# Altium PCB PCB.PcbDoc
Units mil, origin at the board's own origin, x right, y up, seen from the top; angles counter-clockwise.
Board outline 2358.93 x 1717.46 mil, 2 copper layers (Top Layer, Bottom Layer); 45 components, 34 nets, 180 pads, 77 vias.
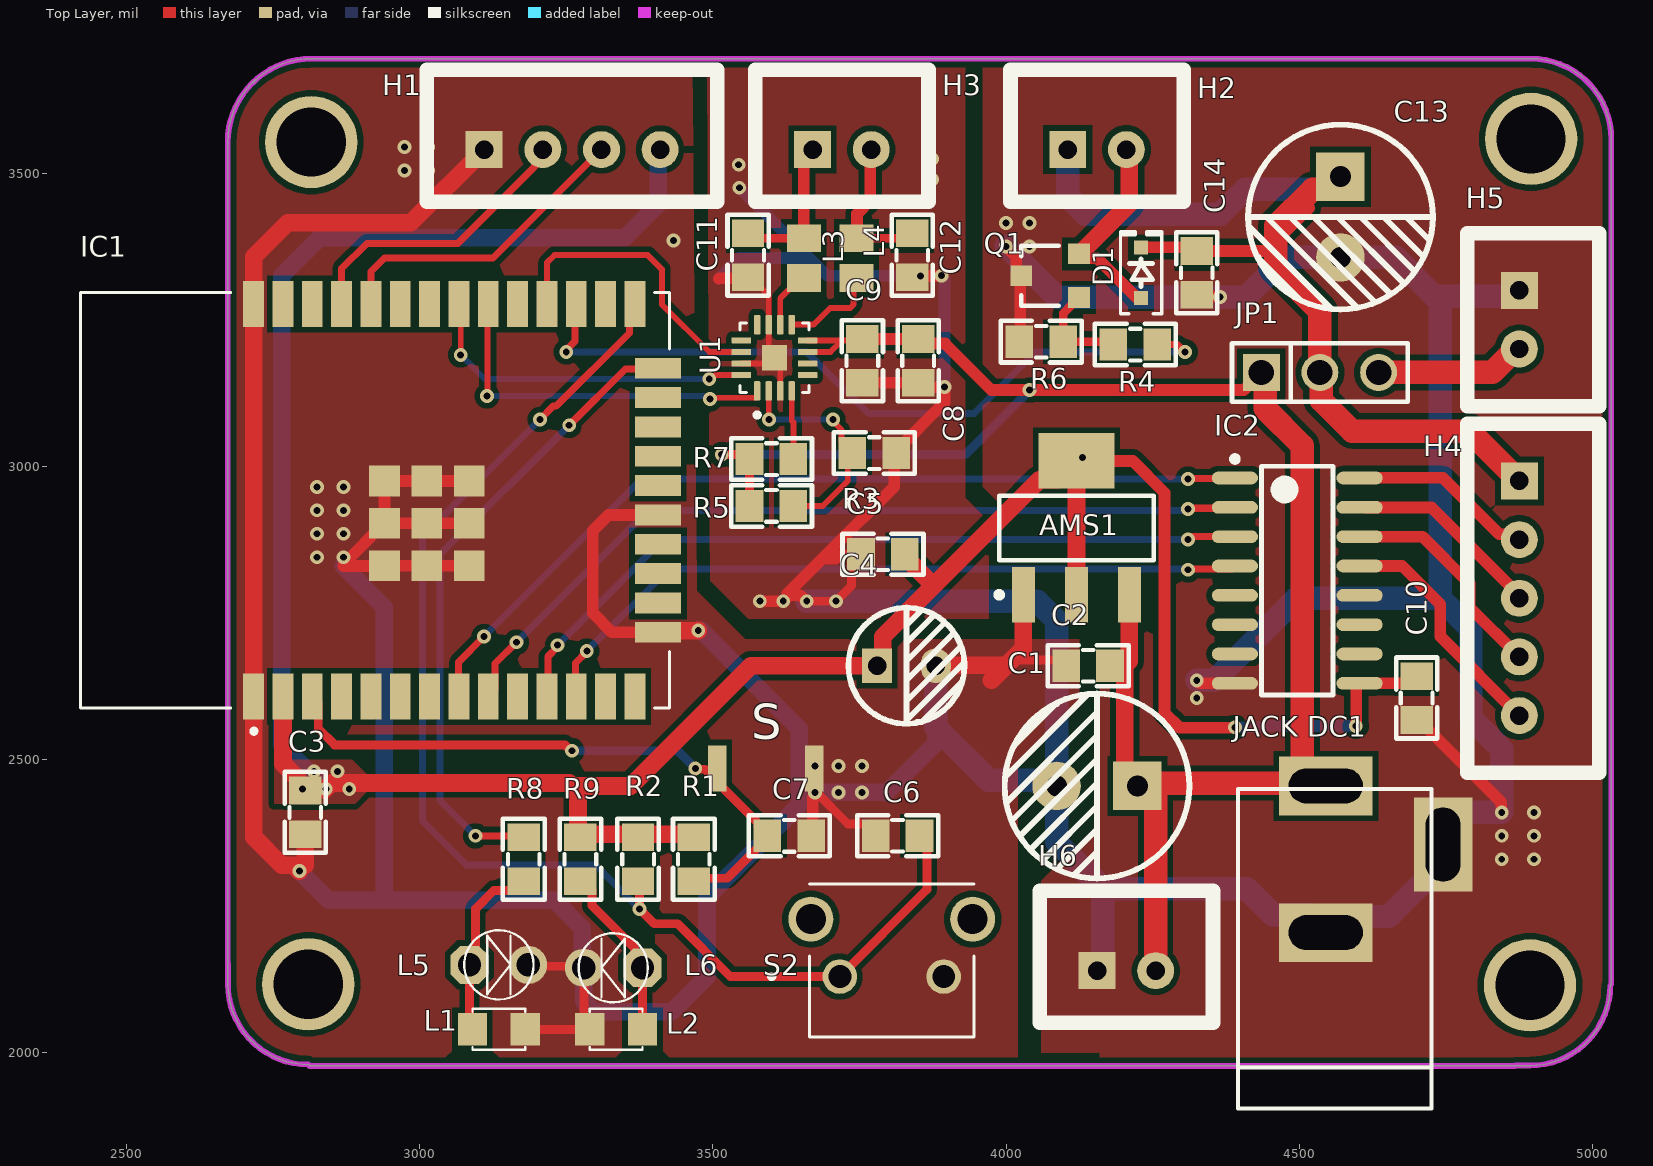
[diagram p0: Top Layer view]
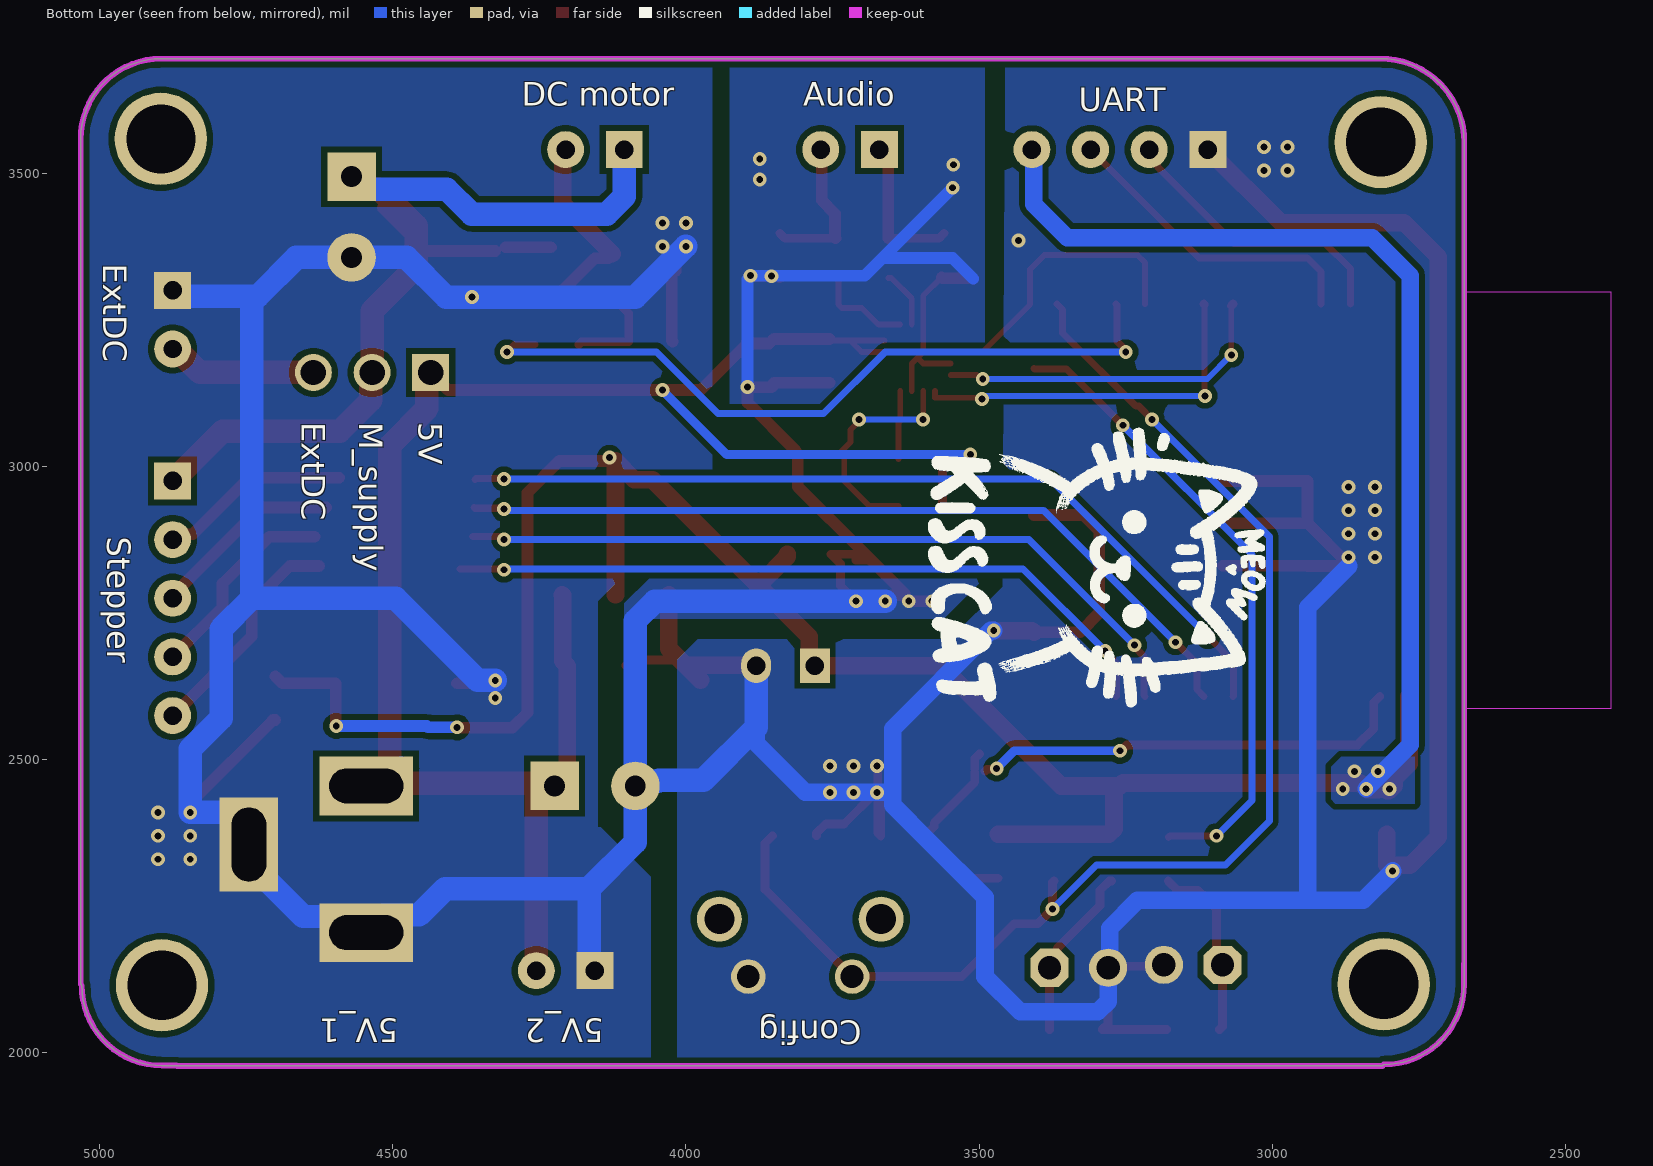
[diagram p1: Bottom Layer view, seen from below]
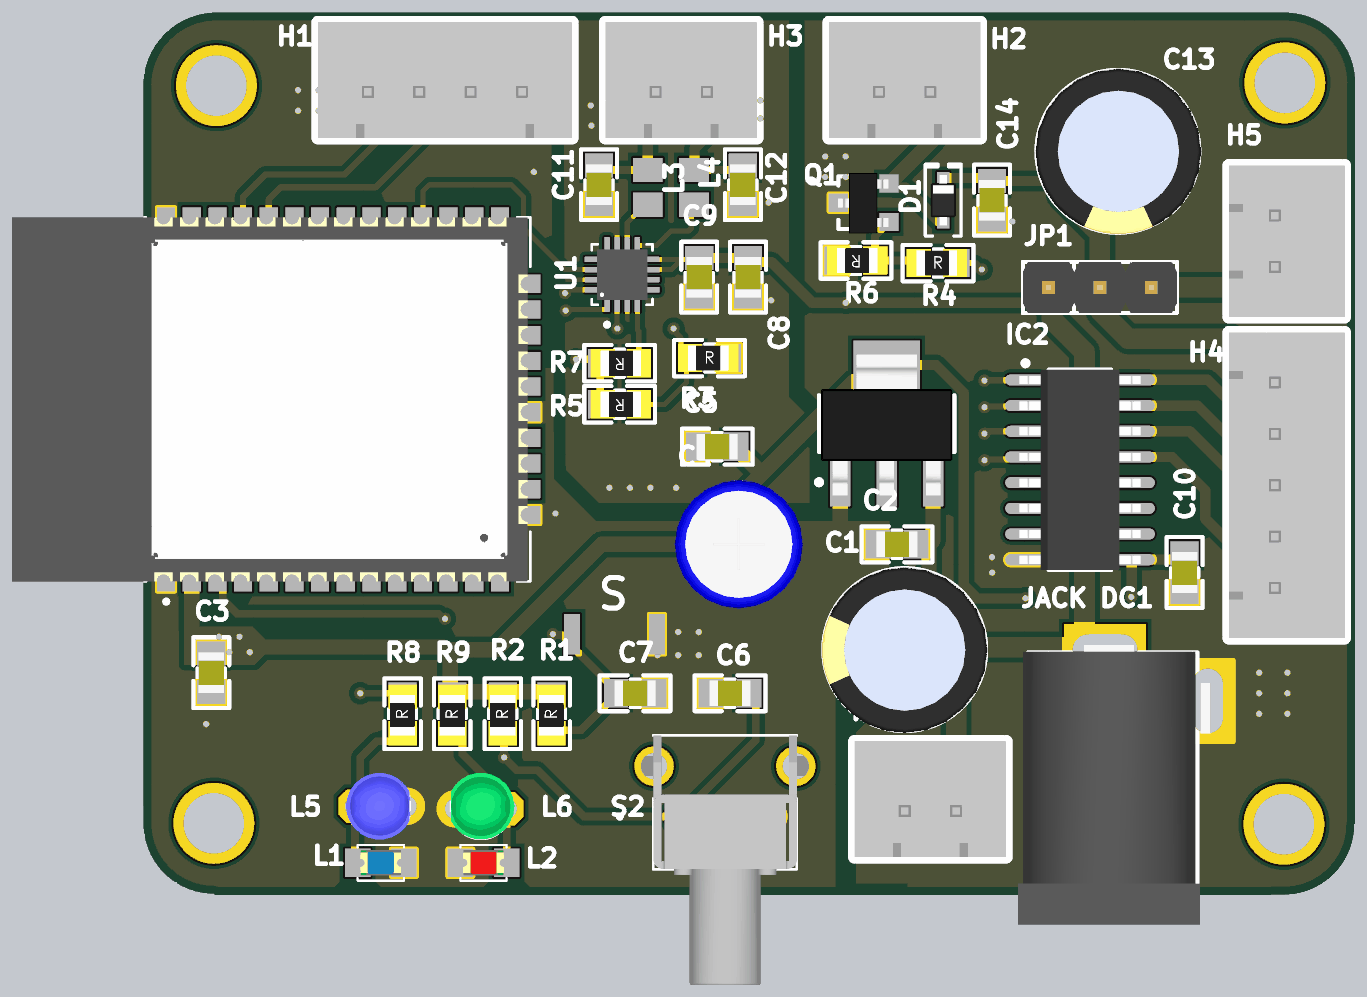
[diagram p2: 3D render of the assembled board from above, using the file's embedded part models]

## Layer stack, top to bottom
Top Solder: solder mask 0.4, Solder Resist, Dk 3.5
Top Layer: signal copper 1.4
Dielectric 1: dielectric 12.6, FR-4, Dk 4.8
Bottom Layer: signal copper 1.4
Bottom Solder: solder mask 0.4, Solder Resist, Dk 3.5

## Board outline
2673.2,2116.8 2673.2,2151.8 2672.87,2147.13 2672.87,3552.87 cw(c2815,3552.87) 2815,3695 4895,3695 cw(c4895,3558.2) 5031.8,3558.2 5031.8,2116.8 5030,2115 cw(c4893.2,2115) 4893.2,1978.2 4868.2,1978.2 4867.54,1977.54 2812.46,1977.54 2810,1980 cw(c2810,2116.8)

## Design rules (kind name [scope] priority, off if disabled: settings)
Clearance [All] p1: gap=10 ignorepadtopadclearanceinfootprint=FALSE except(5: SMDPad-SMDPad; 9: Arc-Arc Arc-Track Arc-SMDPad Track-Track Track-SMDPad)
PolygonConnect [All] p1: connectstyle=Direct reliefconductorwidth=10 reliefentries=4 polygonreliefangle="90 Angle" airgapwidth=10
RoutingVias [All] p1: holewidth=11.81 width=23.62 viastyle="Through Hole" minholewidth=11.81 minwidth=19.68 maxholewidth=15.75 maxwidth=23.62
SolderMaskExpansion [All] p1: expansion=4 istentingtop=FALSE
Width [All] p1: maxlimit=40 minlimit=10 preferedwidth=15
30 further rules are at their usual default settings.

## Components (designator, comment, footprint, x,y, rotation, side; value= is the part's Value field where it differs from the comment)
AMS1 "" SOT223 4120,2895 r0 top value="AMS1117-3.3V SOT223"
C1 "470uF" "tu hoa 8mm" 4155,2455 r180 top
C2 "104" "tu 0805" 4140,2660 r180 top
C3 "104" "tu 0805" 2805,2410 r270 top
C4 "220uF" "tu hoa 5mm" 3830,2660 r0 top
C5 "104" "tu 0805" 3790,2850 r180 top
C6 "106" "tu 0805" 3630,2370 r0 top
C7 "106" "tu 0805" 3815,2370 r180 top
C8 "106" "tu 0805" 3850,3180 r270 top
C9 "104" "tu 0805" 3755,3180 r270 top
C10 "104" "tu 0805" 4700,2605 r270 top
C11 "221" "tu 0805" 3560,3360 r270 top
C12 "221" "tu 0805" 3840,3360 r270 top
C13 "470uF" "tu hoa 8mm" 4570,3425 r270 top
C14 "104" "tu 0805" 4325,3330 r270 top
D1 "1N4148" "DIODE SOD323F" 4230,3330 r90 top
H1 "UART" XH2.54M-4 3110,3540 r0 top
H2 "Audio" XH2.54M-2 4105,3540 r0 top
H3 "Audio" XH2.54M-2 3670,3540 r0 top
H4 "Stepper" XH2.54M-5 4875,2975 r270 top
H5 "Ext-MS" XH2.54M-2 4875,3300 r270 top
H6 "Ext-MS" XH2.54M-2 4155,2140 r0 top
IC1 "ESP32 WROOM 32" ESP32-WROOM-32D 2924.06,2942.13 r90 top
IC2 "ULN2003" "SOP 16" 4496.3,2805 r0 top
"JACK DC1" "JACK DC 5.5" "JACK DC 5.5" 4645,2330 r90 top value="Jac DC"
JP1 "MSS" "JP 1x3 DT" 4435,3160 r0 top
L1 "Config" LED-0805-Blue 3090,2040 r0 top
L2 "Power" LED-0805-Red 3380,2040 r180 top
L3 "Ferrit" INDC2012X105N 3655,3355 r90 top
L4 "Ferrit" INDC2012X105N 3745,3355 r90 top
L5 "LED 3mm" LED-3MM-BLUE 3140,2150 r0 top
L6 "LED 3mm" LED-3MM-GREEN 3380,2145 r180 top
Q1 "AO3400" SOT23 4075,3325 r90 top
R1 "10k" "tro smd 0805" 3465,2330 r90 top
R2 "10k" "tro smd 0805" 3370,2330 r90 top
R3 "100k" "tro smd 0805" 3775,3025 r0 top
R4 "10k" "tro smd 0805" 4220,3210 r0 top
R5 "100k" "tro smd 0805" 3600,2930 r180 top
R6 "10k" "tro smd 0805" 4060,3210 r180 top
R7 "100k" "tro smd 0805" 3600,3010 r180 top
R8 "1k" "tro smd 0805" 3175,2330 r90 top
R9 "1k" "tro smd 0805" 3271.67,2330 r90 top
S "SKRKAEE010" SKRK 3590,2485 r0 top
S2 "1-1825027-2" SW_1-1825027-2 3805,2130 r0 top
U1 "MAX98357AETE" QFN50P300X300X80-17N 3605,3185 r90 top

## Footprints (in the part's own frame and the unit in brackets; to place one, negate y for a bottom-side part, rotate by r counter-clockwise, add the part's x,y. Pads: shape width x height; smd on the part's side, far side on the other; paste and mask are expansions set on the pad)
"DIODE SOD323F" [mm] "SOD323F"
  rect 0.6x0.6 smd: 1(-1.1,0) 2(1.1,0)
  silkscreen extent -1.78,-0.89 1.78,0.89, body extent -1.25,-0.62 1.25,0.63, height 0.8
ESP32-WROOM-32D [mm]
  rect 2x0.9 smd: 1(-8.5,5.26) 2(-8.5,3.99) 3(-8.5,2.72) 4(-8.5,1.45) 5(-8.5,0.18) 6(-8.5,-1.09) 7(-8.5,-2.36) 8(-8.5,-3.63) 9(-8.5,-4.9) 10(-8.5,-6.17) 11(-8.5,-7.44) 12(-8.5,-8.71) 13(-8.5,-9.98) 14(-8.5,-11.25) 25(8.5,-11.25) 26(8.5,-9.98) 27(8.5,-8.71) 28(8.5,-7.44) 29(8.5,-6.17) 30(8.5,-4.9) 31(8.5,-3.63) 32(8.5,-2.36) 33(8.5,-1.09) 34(8.5,0.18) 35(8.5,1.45) 36(8.5,2.72) 37(8.5,3.99) 38(8.5,5.26)
  rect 0.9x2 smd: 15(-5.715,-12.25) 16(-4.445,-12.25) 17(-3.175,-12.25) 18(-1.905,-12.25) 19(-0.635,-12.25) 20(0.635,-12.25) 21(1.905,-12.25) 22(3.175,-12.25) 23(4.445,-12.25) 24(5.715,-12.25)
  rect 1.33x1.33 smd: 39(-2.835,-2.24) 39(-2.835,-0.405) 39(-2.835,-4.075) 39(-1,-0.405) 39(-1,-4.075) 39(-1,-2.24) 39(0.835,-0.405) 39(0.835,-4.075) 39(0.835,-2.24)
  Keep-Out Layer region: 9,6.45 -9,6.45 -9,12.75 9,12.75
  Keep-Out Layer region: 9,6.45 -9,6.45 -9,12.75 9,12.75
  silkscreen extent -10.1,-12.75 9,12.75, body extent -9,-12.62 9,12.88, height 3.2
INDC2012X105N [mm]
  rect 1.2x1.47 smd: 1(-0.86,0) 2(0.86,0)
"JACK DC 5.5" [mil] "Jac DC input"
  rect 100x160 hole 59.06 slot 125.98 at 90 deg: 1(125,100) 2(-125,100)
  rect 160x100 hole 59.06 slot 125.98 at 0 deg: 3(25,-100)
  silkscreen extent -425,-80 120,250, body extent -410,-105 134,269, height 434
"JP 1x3 DT" [mm]
  rect 1.6x1.6 hole 1.1: 1(0,0)
  round 1.6 hole 1.1: 2(2.54,0) 3(5.08,0)
  silkscreen extent -1.27,-1.27 6.35,1.27, body extent -1.27,-1.27 6.35,1.27, height 8.54
LED-3MM-BLUE [mil]
  oct 65x65 hole 40: 1(-55,0)
  round 65 hole 40: 2(45,0)
  silkscreen extent -64,-59 54,59, body extent -72,-65 54,65, height 184
LED-3MM-GREEN [mil]
  oct 65x65 hole 40: 1(0,0)
  round 65 hole 40: 2(100,0)
  silkscreen extent -9,-59 109,59, body extent -15,-70 112,60, height 182
LED-0805-Blue [mil]
  rect 50x55 smd: 1(0,0) 2(90,0)
  silkscreen extent 0,-35 90,35, body extent 5,-25 85,25, height 43
LED-0805-Red [mil]
  rect 50x55 smd: 1(0,0) 2(90,0)
  silkscreen extent 0,-35 90,35, body extent 5,-25 85,25, height 43
QFN50P300X300X80-17N [mm]
  rrect25% 0.84x0.27 smd: 1(-1.435,0.75) 2(-1.435,0.25) 3(-1.435,-0.25) 4(-1.435,-0.75) 9(1.435,-0.75) 10(1.435,-0.25) 11(1.435,0.25) 12(1.435,0.75)
  rrect25% 0.27x0.84 smd: 5(-0.75,-1.435) 6(-0.25,-1.435) 7(0.25,-1.435) 8(0.75,-1.435) 13(0.75,1.435) 14(0.25,1.435) 15(-0.25,1.435) 16(-0.75,1.435)
  rect 1.1x1.1 smd paste-0.2: 17(0,0)
  silkscreen extent -2.57,-1.5 1.5,1.5, body extent -1.25,-1.25 1.25,1.25, height 0.55
SKRK [mm]
  rect 0.8x2 smd: 1(-2.1,0) 2(2.1,0)
  body extent -2.4,-1.45 2.4,1.45, height 2
"SOP 16" [mm] "SOIC, 16-Leads, Body 9.90x3.91mm, Pitch 1.27mm, IPC Medium Density"
  oval 2x0.55 smd: 1(-2.7,4.445) 2(-2.7,3.175) 3(-2.7,1.905) 4(-2.7,0.635) 5(-2.7,-0.635) 6(-2.7,-1.905) 7(-2.7,-3.175) 8(-2.7,-4.445) 9(2.7,-4.445) 10(2.7,-3.175) 11(2.7,-1.905) 12(2.7,-0.635) 13(2.7,0.635) 14(2.7,1.905) 15(2.7,3.175) 16(2.7,4.445)
  silkscreen extent -2.82,-4.95 1.55,5.39, body extent -3,-4.95 3,4.95, height 1.4
SOT23 [mm] "SOT23"
  rect 0.9x0.95 smd: 1(-0.95,-1.25) 2(0,1.25)
  rect 0.9x0.95 smd mask+0: 3(0.95,-1.25)
  silkscreen extent -1.3,-0.38 1.3,1.25, body extent -1.52,-1.23 1.48,1.27, height 1.06
SOT223 [mm]
  rect 1x2.4 smd: 1(-2.3,-2.9) 2(0,-2.9) 3(2.3,-2.9)
  rect 3.3x2.4 smd: 4(0,2.9)
  silkscreen extent -3.47,-3.02 3.35,1.4, body extent -3.25,-3.56 3.25,3.4, height 1.68
SW_1-1825027-2 [mm]
  round 1.498 hole 0.99: 1(-2.25,0) 2(2.25,0)
  round 1.95 hole 1.3: S1(-3.505,2.49) S2(3.505,2.49)
  silkscreen extent -5.3,-2.61 3.55,4.01, body extent -4.19,-8.34 4.22,4.02, height 8.08
"tro smd 0805" [mm]
  rect 1.2x1.4 smd: 1(-0.946,-0.061) 2(0.954,-0.061)
  silkscreen extent -1.75,-0.97 1.75,0.84, body extent -1.56,-0.76 1.44,0.64, height 0.53
"tu 0805" [mm] "Compoment SMD 80x50mil"
  rect 1.2x1.4 smd: 1(-0.946,-0.003) 2(0.954,-0.003)
  silkscreen extent -1.75,-0.89 1.75,0.89, body extent -1.01,-0.64 1.01,0.63, height 0.61
"tu hoa 5mm" [mm]
  rect 1.3x1.5 hole 0.8: 1(-1.27,0)
  oval 1.3x1.5 hole 0.8: 2(1.27,0)
  silkscreen extent -2.51,-2.51 2.51,2.51, body extent -3.12,-3.18 3.23,3.18, height 11.53
"tu hoa 8mm" [mm]
  rect 2.1x2.1 hole 0.9: 1(-1.75,0)
  round 2.1 hole 0.9: 2(1.75,0)
  silkscreen extent -4,-4 4,4, body extent -4.1,-4.07 4.1,4.13, height 14.4
XH2.54M-2 [mm]
  rect 1.6x1.6 hole 0.8: 1(0,0)
  round 1.6 hole 0.8: 2(2.54,0)
  silkscreen extent -2.48,-2.26 5.02,3.46, body extent -2.48,-2.26 5.02,3.48, height 6.91
XH2.54M-4 [mm]
  rect 1.6x1.6 hole 0.8: 1(0,0)
  round 1.6 hole 0.8: 2(2.54,0) 3(5.08,0) 4(7.62,0)
  silkscreen extent -2.48,-2.26 10.1,3.46, body extent -2.48,-2.26 10.1,3.48, height 6.91
XH2.54M-5 [mm]
  rect 1.6x1.6 hole 0.8: 1(0,0)
  round 1.6 hole 0.8: 2(2.54,0) 3(5.08,0) 4(7.62,0) 5(10.16,0)
  silkscreen extent -2.48,-2.26 12.64,3.46, body extent -2.48,-2.26 12.64,3.48, height 6.91

## Part data
AMS1: library part "AMS1117 SMD", "Dán", Chung_Loai=Dán, Don_Vi=Con, Ma_Hang=MH000596
C1 C13: library part "Tu Hoa 470uF 16V 8x11", "Cắm", Chung_Loai=Cắm, Don_Vi=Con, Ma_Hang=MH006550, So_Chan=2, Ten_Linh_Kien="Tụ Hóa 470uF 16V 8x11MM"
C2 C3 C5 C9 C10 C14: library part "Tu 0805 104 50V 10%", "Dán", Chung_Loai=Dán, Don_Vi=Con, Ma_Hang=MH004551, So_Chan=2, Ten_Linh_Kien="Tụ 0805 104-100nF 10% 50V"
C4: library part "Tu Hoa 220uF 10V 6x11", "Cắm", Chung_Loai=Cắm, Don_Vi=Con, Ma_Hang=MH004510, So_Chan=2, Ten_Linh_Kien="Tụ Hóa 220uF 10V 6x11MM"
C6 C7 C8: library part "Tu 0805 106 16V 10%", "Dán", Chung_Loai=Dán, Don_Vi=Con, Ma_Hang=MH004553, So_Chan=2, Ten_Linh_Kien="Tụ 0805 106-10uF 10% 16V"
C11 C12: library part "Tu 0805 224 50V 10%", "Dán", Chung_Loai=Dán, Don_Vi=Con, Ma_Hang=MH004559, So_Chan=2, Ten_Linh_Kien="Tụ 0805 224-0.22uF 10% 50V"
D1: "SMD"
H1: library part "Header 4P 2.54 Duc Thang", "Cắm", Chung_Loai=Cắm, Don_Vi=Con, Ma_Hang=MH001285, Ten_Linh_Kien="Header 4P XH2.54-4P Đực Thẳng"
H2 H3 H5 H6: library part "Header 2P 2.54 Duc Thang", "Cắm", Chung_Loai=Cắm, Don_Vi=Con, Ma_Hang=MH001283, Ten_Linh_Kien="Header 2P XH2.54-2P Đực Thẳng"
H4: library part "Header 5P 2.54 Duc Thang", "Cắm", Chung_Loai=Cắm, Don_Vi=Con, Ma_Hang=MH001298, Ten_Linh_Kien="Header 5P XH2.54-5P Đực Thẳng"
IC2: library part "ULN2003A SMD", "Dán", Chung_Loai=Dán, Don_Vi=Con, Ma_Hang=MH002408, Ten_Linh_Kien="ULN2003 SOP16"
JP1: library part "JP 1x3 2.54 Duc Thang", "Cắm", Chung_Loai=Cắm, Don_Vi=Con, Ma_Hang=MH000903, Ten_Linh_Kien="Jump Đơn Đực 2.54MM 1x40P Thẳng 11MM"
L1: library part "LED 0805 Xanh Duong", "Dán", Chung_Loai=Dán, Don_Vi=Con, Ma_Hang=MH002327, Ten_Linh_Kien="LED 0805 Màu Xanh Dương (Blue)"
L2: library part "LED 0805 Do", "Dán", Chung_Loai=Dán, Don_Vi=Con, Ma_Hang=MH000897, Ten_Linh_Kien="LED 0805 Màu Đỏ (Red)"
L3 L4: library part AIML-0805-1R0K-T, "IND 1uH 0.05A 400mâ„", Package="2012 Bourns", Availability="In Stock", Check_prices=https://www.snapeda.com/parts/AIML-0805-1R0K-T/Abracon+LLC/view-part/?ref=eda, MF=Abracon, MP=AIML-0805-1R0K-T, Price=None, Purchase-URL=https://pricing.snapeda.com/search/part/AIML-0805-1R0K-T/?ref=eda, SnapEDA_Link=https://www.snapeda.com/parts/AIML-0805-1R0K-T/Abracon+LLC/view-part/?ref=snap
L5: library part "LED 3mm Xanh Duong", "Cắm", Chung_Loai=Cắm, Don_Vi=Con, Ma_Hang=MH009003, Ten_Linh_Kien="LED 3MM Xanh Dương SS (1000c)"
L6: library part "LED 3mm Xanh La", "Cắm", Chung_Loai=Cắm, Don_Vi=Con, Ma_Hang=MH001054, Ten_Linh_Kien="Led 3MM Phủ Xanh (10c)"
Q1: library part Si2302DS, "N-Channel MOSFET", LatestRevisionDate=17-Jul-2002, LatestRevisionNote="Re-released for DXP Platform.", PackageDescription="TO, Flat Index; 3 In-Line, Axial Leads; Body Dia. 4.6mm; Lead Dia. 0.5 mm (max)", PackageReference=E3, PackageVersion=1995/1996, Published=8-Jun-2000, Publisher="Altium Limited"
R1 R2 R3 R4 R5 R6 R7 R8 R9: library part "Tro 0805 5% 10k", "Dán", Chung_Loai=Dán, Don_Vi=Con, Ma_Hang=MH005239, So_Chan=2, Ten_Linh_Kien="Trở 0805 5% 10k"
S: "Switch Tactile N.O. SPST Round Button Gull Wing 0.05A 12VDC 1.57N SMD T/R", Package=None, Availability=Unavailable, MF=ALPS, MP=SKRKAEE010, Price=None, SnapEDA_Link=https://www.snapeda.com/parts/SKRKAEE010/ALPS/view-part/380772/?ref=snap
S2: "Tactile Switch SPST-NO Side Actuated Through Hole, Right Angle", Package=None, Availability=Good, Check_prices=https://www.snapeda.com/parts/1-1825027-2/TE%20Connectivity%20ALCOSWITCH%20Switches/view-part/904477/?ref=eda, MF="TE Connectivity", MP=1-1825027-2, Price=None, Purchase-URL=https://pricing.snapeda.com/search/part/1-1825027-2/?ref=eda, SnapEDA_Link=https://www.snapeda.com/parts/1-1825027-2/TE%20Connectivity%20ALCOSWITCH%20Switches/view-part/904477/?ref=snap
U1: "Audio Amp Speaker 1-CH Mono 3.2W Class-D 16-Pin TQFN EP T/R", Package=None, Availability="In Stock", Check_prices=https://www.snapeda.com/parts/MAX98357AETE/Maxim+Integrated/view-part/?ref=eda, MF="Maxim Integrated", MP=MAX98357AETE, Price=None, Purchase-URL=https://pricing.snapeda.com/search/part/MAX98357AETE/?ref=eda, SnapEDA_Link=https://www.snapeda.com/parts/MAX98357AETE/Maxim+Integrated/view-part/?ref=snap

## Free pads (board coordinates)
  round 157.48 hole 118.11: ""(2810,2116.8) ""(2815,3552.87) ""(4893.2,2115) ""(4895,3558.2)

## Via types
v1: diameter 23.62, hole 11.81, Top Layer to Bottom Layer, tented both sides, 77 vias

## Nets (pads, with @x,y where several pads share a name; then routed paths per layer and width w, separated by ;. In a path a pad name is that pad's centre, name@x,y a point inside that pad or via, vN(x,y) a via of type N, cw(c..) or ccw(c..) an arc to the next point about the centre after c; other vN are vias at no path point)
1A: H4.2 IC2.16 | length 327.5
  Top Layer w20: IC2.16@4591.13,2980.32 4744.68,2980.32 4840.82,2884.18 4865.82,2884.18 H4.2
1B: H4.3 IC2.15 | length 329.1
  Top Layer w20: IC2.15@4612.95,2929.68 4725.37,2929.68 4875,2780.05 H4.3
2A: H4.4 IC2.14 | length 350.4
  Top Layer w20: IC2.14@4632.95,2880 4710,2880 4790,2800 4790,2760 H4.4
2B: H4.5 IC2.13 | length 387.5
  Top Layer w20: IC2.13@4625.35,2830 4675,2830 4740,2765 4740,2710 H4.5
3V3: AMS1.2 AMS1.4 C3.1 C4.1 C5.1 C10.1 H1.4 IC1.2 IC2.9 R1.2 R2.2 R9.2 | length 5068.1
  Top Layer w20: AMS1.4 4215.83,3009.17 4270,2955 4270,2580 4295.69,2554.31 4389.31,2554.31 v1(4390,2555) ; v1(4596.07,2557.22) 4596.76,2557.91 4596.76,2629.24 4597.53,2630 IC2.9 4602.91,2630.32 4687.95,2630.32 C10.1
  Top Layer w30: IC1.2 2766.97,2493.03 2792.31,2467.69 2792.31,2455.85 2800.93,2447.23 C3.1 ; C3.1@2819.15,2448.28 2838.28,2448.28 2850,2460 3255.08,2460 ; 3260,2455 3360,2455 3565,2660 C4.1 3789.38,2669.38 3789.38,2709.38 3870,2790 ; 3270,2451.35 3270,2381.64 3279.06,2372.57 R1.2@3467.39,2372.57 ; C5.1 3827.23,2846.2 3870,2803.43 3870,2790 ; AMS1.2 AMS1.4 4087.76,2976.93 4056.93,2976.93 3870,2790
  Bottom Layer w20: v1(4390,2555) 4439.59,2555 4441.81,2557.22 v1(4596.07,2557.22)
  Bottom Layer w30: v1(2840,2450) 2765,2525 2765,3325 2830,3390 3350,3390 3406.52,3446.52 3406.52,3536.52 H1.4
  other v1: 2800,2450 2880,2450 2820,2480 2860,2480 4130,3015
+5: "JACK DC1.1" AMS1.3 C1.1 C2.1 C8.1 C9.1 H6.2 JP1.1 R5.2 R7.2 U1.7 U1.8 | length 3378.1
  Top Layer w10: U1.7 3700.31,3194.84 3720,3214.53 ; U1.8 3720,3214.53 ; C9.1 3752.17,3214.53 3720,3214.53
  Top Layer w15: v1(3515,3020) 3554.82,3020 R7.2 R5.2
  Top Layer w20: C9.1 C8.1 3857.72,3209.38 3895.62,3209.38 3975,3130 v1(4040,3130) 4405,3130 4425,3150 JP1.1
  Top Layer w30: AMS1.3 4210,2780.28 4210,2667.91 4202.23,2660.13 4202.23,2476.67 C1.1
  Top Layer w40: H6.2 4255,2460 4510,2460 ; JP1.1@4425,3150 4439.93,3150 4441.42,3148.5 4441.42,3098.58 4505,3035 4505,2465 4510,2460 ; 4545,2455 4515,2455 4510,2460
  Bottom Layer w15: v1(3515,3020) 3930,3020 v1(4040,3130)
  Bottom Layer w20: JP1.1@4413.5,3138.5 JP1.1
  Bottom Layer w40: 4485,2485 4515,2455 4545,2455
BCLK: IC1.31 U1.16 | length 586
  Top Layer w10: v1(3070,3190) IC1.31@3070,3273.74 ; v1(3493.8,3149.04) 3497.49,3149.04 3503.93,3155.47 3548.19,3155.47 U1.16@3548.31,3155.35
  Top Layer w15: IC1.31 IC1.31@3070,3273.74
  Bottom Layer w10: v1(3070,3190) 3110.96,3149.04 v1(3493.8,3149.04)
Boot: C7.1 IC1.25 R2.1 S2.1 | length 2211.6
  Top Layer w12: v1(3205,3080) 3227.82,3102.82 3232.82,3102.82 3357.6,3227.6 3357.6,3267.4 IC1.25
  Top Layer w15: R2.1 3375,2290.17 v1(3375,2245) 3400,2220 3440,2220 3530,2130 S2.1 3865,2278.58 3865,2357.36 C7.1
  Bottom Layer w12: v1(3205,3080) 3005,2880 3005,2395 3080,2320 3300,2320 v1(3375,2245)
DAC: IC1.10
DIN: IC1.30 U1.1 | length 632.3
  Top Layer w10: v1@3115.98,3120.98 IC1.30@3115.98,3275.79 ; v1(3495,3115) 3496.97,3116.97 3575.16,3116.97 3575.47,3117.28 U1.1
  Top Layer w15: v1(3115,3120) v1@3115.98,3120.98 ; IC1.30@3115.98,3275.79 IC1.30
  Bottom Layer w10: v1(3115,3120) 3490,3120 v1(3495,3115)
Ext-M: H5.2 JP1.3 | length 256.6
  Top Layer w40: JP1.3 4828.78,3160 4868.78,3200 H5.2
GND: "JACK DC1.2" "JACK DC1.3" AMS1.1 C1.2 C2.2 C3.2 C4.2 C5.2 C6.2 C7.2 C8.2 C9.2 C10.2 C11.2 C12.2 C13.2 C14.2 H1.1 H5.1 H6.1 IC1.1 IC1.15 IC1.19 IC1.38 IC1.39 IC2.8 L1.2 L2.2 L5.2 L6.2 Q1.2 R3.2 R6.2 S2.2 S.2 U1.3 U1.11 U1.15 U1.17 | length 13556.9
  Top Layer w10: U1.15 3595.16,3175.16 U1.17 ; C11.2@3563.8,3322.43 3595.16,3291.07 U1.11 3595.16,3194.84 U1.17 ; U1.3 3614.84,3175.16 U1.17
  Top Layer w15: L1.2 L2.2 3280,2050 L6.2 3277.5,2147.5 3187.5,2147.5 L5.2 ; v1(3660,2770) v1(3710,2770) 3736.3,2796.3 3736.3,2834.01 C5.2 3700.13,2850.13 ; S.2 v1@3672.68,2440.52 ; 3684.1,2840.13 3710.13,2840.13 ; C7.2 3777.43,2374.07 3761.3,2390.19 3730.25,2390.19 3676.3,2444.14 v1(3673.96,2444.14) 3673.96,2441.81 v1@3672.68,2440.52 ; 4010,2670 4092.56,2670 C2.2 ; v1@3672.68,2440.52 3672.68,2374.97 C6.2 3667.57,2435.42 v1@3672.68,2440.52
  Top Layer w20: IC1.39@3084.49,2830.51 3012.24,2830.51 2940,2830.51 2939.49,2830 2870,2830 2870.69,2830.69 2870.69,2833.45 IC1.39@2940,2902.76 ; IC1.39@3084.49,2902.76 3012.24,2902.76 IC1.39@2940,2902.76 ; IC1.39@3084.49,2975 3012.24,2975 2940,2975 IC1.39@2940,2902.76 ; IC1.15 3327.87,2717.13 3295,2750 3295,2890 3322.13,2917.13 IC1.19 ; 3510,3320 3510.69,3320.69 3562.07,3320.69 C11.2@3563.8,3322.43 ; v1(3580,2770) v1(3620,2770) 3630,2780 3649.02,2780 3659.02,2770 v1(3660,2770) ; 3626.98,2783.02 3684.1,2840.13 3697.12,2853.15 3809.01,2965.05 3809.01,3019.04 R3.2 3812.57,3026.54 3894.93,3108.89 3894.93,3134.93 v1(3895,3135) 3853.35,3135 C8.2@3845.93,3142.43 ; C9.2 C8.2@3845.93,3142.43 ; C12.2 3841.75,3324.31 3889.31,3324.31 v1(3890,3325) ; C8.2 C8.2@3845.93,3142.43 ; v1(4000,3375) 4000,3374.02 4017.09,3356.93 Q1.2@4017.09,3332.72 ; R6.2 4024.11,3214.07 4024.11,3323.32 Q1.2 ; C14.2 4328.19,3289.1 4364.15,3289.1 v1(4364.84,3288.4) ; v1(4325,2635) 4325.98,2635 4330.66,2630.32 4389.68,2630.32 IC2.8 ; C10.2 4703.8,2567.43 4844.31,2426.92 4844.31,2410.69 v1(4845,2410)
  Top Layer w30: v1(2795,2310) 2785.13,2319.87 2765.13,2319.87 2716.97,2368.03 IC1.1 IC1.38 2716.97,3356.97 2775,3415 2985,3415 H1.1 ; 2804.87,2319.87 C3.2 ; IC1.15 3409.06,2719.84 3474.84,2719.84 v1(3475,2720) ; C4.2 3880.55,2660.55 4000.55,2660.55 ; 3975,2635 4000.55,2660.55 ; AMS1.1 4029.45,2689.45 4010,2670 4000.55,2660.55
  Top Layer w40: H6.1@4145,2130 H6.1
  Bottom Layer w20: L6.2@3277.5,2147.5 L6.2 ; 3510,3320 3545,3355 3665,3355 ; v1(3545,3475) 3665,3355 ; v1(3895,3135) 3895,3319.02 3890,3324.02 v1(3890,3325) 3695,3325 3665,3355 ; 4705,2395 4745,2355
  Bottom Layer w30: v1(2795,2310) 2845,2260 2940,2260 ; 2870,2830 2940,2760 2940,2260 ; L6.2@3277.5,2147.5 3277.5,2212.5 3230,2260 2940,2260 ; L6.2 3280,2087.57 3297.57,2070 3430,2070 3490,2130 3490,2265 3585.98,2360.98 3647.5,2422.5 3647.5,2444.73 ; v1(3475,2720) 3480,2720 3647.5,2552.5 3647.5,2444.73 ; 3880,2555 3880,2527.5 3796.64,2444.14 v1(3753.96,2444.14) v1(3713.96,2444.14) v1(3673.96,2444.14) 3648.09,2444.14 3647.5,2444.73 ; H6.1@4145,2130 H6.1
  Bottom Layer w40: v1(3660,2770) v1(3710,2770) 4052.67,2770 4086.1,2736.57 C1.2@4086.1,2465 ; C4.2 3880,2555 3970,2465 4045.93,2465 4047.76,2463.17 4077.94,2463.17 C1.2 4086.1,2358.9 4165,2280 ; v1(4000,3375) 4086.6,3288.4 v1(4364.84,3288.4) 4408.4,3288.4 4476.1,3356.1 C13.2 4663.9,3356.1 4730,3290 4740,3290 ; H6.1 4165,2150 4165,2280 ; v1(4325,2635) 4355,2635 4495,2775 4740,2775 ; H5.1 4865,3290 4740,3290 ; 4165,2280 4410,2280 4455,2235 4515,2235 4545,2205 4572.43,2232.43 4652.43,2232.43 4715,2295 4745,2325 4745,2355 4745,2380 4775,2410 v1(4845,2410) 4845,2518.03 4792.5,2570.53 4792.5,2722.5 4740,2775 ; 4740,2775 4740,3290
  other v1: 4845,2330 4900,2330 4845,2370 4900,2370 4900,2410 3673.96,2489.14 3713.96,2489.14 3753.96,2489.14 4325,2605 2825,2845 2870,2845 2825,2885 2870,2885 2825,2925 2870,2925 2825,2965 2870,2965 3853.96,3324.14 4040,3375 3432.94,3384.97 4000,3415 4040,3415 3873.96,3489.14 2973.96,3504.14 3013.96,3504.14 3543.96,3514.14 3873.96,3524.14 2973.96,3544.14 3013.96,3544.14
IN1: IC1.8 IC2.1 | length 1483.4
  Top Layer w12: IC1.8 3065.98,2608.46 3065.98,2665.98 v1(3110,2710) ; v1(4310.28,2978.61) 4310.97,2979.31 4357.7,2979.31 IC2.1@4359.78,2977.22
  Bottom Layer w12: v1(3110,2710) 3378.61,2978.61 v1(4310.28,2978.61)
IN2: IC1.9 IC2.2 | length 1403.8
  Top Layer w12: IC1.9 3128.69,2619.2 3128.69,2663.69 v1(3165,2700) ; v1(4310.28,2926.94) 4311.81,2928.47 4359.63,2928.47 IC2.2@4361.16,2930
  Bottom Layer w12: v1(3165,2700) 3390,2925 4308.34,2925 v1(4310.28,2926.94)
IN3: IC1.11 IC2.3 | length 1298.3
  Top Layer w12: IC1.11 3218.48,2609 3218.48,2675.34 3235,2691.86 v1(3235,2695) ; v1@4310,2880 IC2.3@4363.38,2880
  Bottom Layer w12: v1(3235,2695) 3415.28,2875.28 v1(4310.28,2875.28)
IN4: IC1.12 IC2.4 | length 1245.2
  Top Layer w12: IC1.12 3265.98,2608.46 3265.98,2664.85 3285,2683.87 v1(3285,2685) ; v1(4310.28,2823.61) 4311.67,2825 IC2.4@4385.3,2825
  Bottom Layer w12: v1(3285,2685) 3425,2825 4308.89,2825 v1(4310.28,2823.61)
LED: IC1.24 R8.2 | length 1090.9
  Top Layer w12: v1(3095,2370) 3174.97,2370 R8.2 ; v1(3255,3070) 3351,3166 3405.21,3166 IC1.24
  Bottom Layer w12: v1(3095,2370) 3035,2430 3035,2850 v1(3255,3070)
LRCLK: IC1.28 U1.14 | length 510.7
  Top Layer w10: IC1.28 3216.97,3346.97 3230,3360 3389,3360 3413,3336 3413,3276 3494.16,3194.84 U1.14
M+: C13.1 C14.1 D1.2 H2.1 H4.1 JP1.2 | length 1738.1
  Top Layer w20: D1.2 C14.1@4307.31,3373.31 ; C14.1 4443.33,3367.23 ; 4473.05,3396.95 4516.38,3440.27
  Top Layer w30: H2.1 H2.1@4121.5,3523.5
  Top Layer w40: JP1.2@4535,3155 4535,3265 4460,3340 4460,3410 4522.56,3472.56 4548.66,3472.56 C13.1 ; JP1.2 4537.2,3157.8 4537.2,3112.8 4590,3060 4790,3060 H4.1
  Bottom Layer w40: H2.1 4105,3460 4135,3430 4365,3430 4407.56,3472.56 4548.66,3472.56 C13.1
M-: D1.1 H2.2 Q1.3 | length 352.9
  Top Layer w20: Q1.3@4125.2,3362.4 Q1.3 4131.93,3354.68 4155.32,3354.68 4221.5,3288.5 4228.19,3288.5 D1.1 ; H2.2 H2.2@4210,3535
  Top Layer w30: Q1.3@4125.2,3362.4 4210,3447.2 H2.2@4210,3535
NC: IC1.32
NetC11_1: C11.1 H3.1 L3.2 | length 256
  Top Layer w15: C11.1 3568.24,3388.86 L3.2
  Top Layer w20: L3.2 3655,3525 H3.1
NetC12_1: C12.1 H3.2 L4.2 | length 259.8
  Top Layer w15: L4.2 3831.5,3388.86 C12.1
  Top Layer w20: L4.2 3745.76,3389.62 3745.76,3430.76 3768.5,3453.5 3768.5,3538.5 H3.2
NetL1_1: L1.1 L5.1 R8.1 | length 313.4
  Top Layer w15: L1.1 3085,2045 L5.1 3095,2160 3095,2245 3126.65,2276.65 3161.27,2276.65 R8.1
NetL2_1: L2.1 L6.1 R9.1 | length 299
  Top Layer w15: R9.1 3278,2292.77 3294.12,2276.65 3294.12,2250.88 3366.86,2178.14 3366.86,2158.14 L6.1 L2.1
NetQ1_1: Q1.1 R4.1 R6.1 | length 174.5
  Top Layer w15: Q1.1 4123.23,3287.6 4113.01,3277.38 4113.01,3276.4 4097.23,3260.61 R6.1 4177.98,3212.39 R4.1
NetR3_1: R3.1 R5.1 U1.2 | length 390.2
  Top Layer w10: U1.2 3595.16,3080.58 v1(3595.64,3080.1) ; R5.1 3687.39,2932.39 3730,2975 3730,3014.83 R3.1 3719.15,3041.23 3719.15,3062.16 3705,3076.31 v1(3705,3080)
  Bottom Layer w10: v1(3595.64,3080.1) 3595.74,3080 v1(3705,3080)
NetR7_1: R7.1 U1.4 | length 117.2
  Top Layer w10: U1.4 3634.53,3077.47 3637.23,3074.77 R7.1
OUTN: L3.1 U1.10 | length 99.4
  Top Layer w10: U1.10 3614.84,3286.3 3649.69,3321.14 L3.1
OUTP: L4.1 U1.9 | length 167.1
  Top Layer w10: U1.9 3671.5,3241.5 3700,3270 3734.14,3270 3740,3275.86 3740,3316.14 L4.1
PWM: IC1.27 R4.2 | length 1283.4
  Top Layer w12: v1(3250,3195) 3250,3198.14 3265,3213.14 3265,3274.8 IC1.27 ; R4.2 4292.39,3207.61 v1(4305,3195)
  Bottom Layer w12: v1(3250,3195) 3660,3195 3765,3090 3945,3090 4050,3195 v1(4305,3195)
RST: C6.1 IC1.3 R1.1 S.1 | length 1081.6
  Top Layer w15: IC1.3 2827.19,2597.26 2827.19,2552.81 2855,2525 3247.67,2525 3257.67,2515 v1(3260,2515) ; R1.1@3467.39,2297.77 3524.61,2297.77 3592.77,2365.93 C6.1 3576.65,2385.99 3576.65,2392.05 3507.32,2461.38 S.1@3507.32,2478.25 ; v1(3470,2485) 3471.65,2483.35 3486.65,2483.35 3490,2480 ; S.1@3499.07,2510 3507.32,2501.75 S.1
  Bottom Layer w15: v1(3260,2515) 3440,2515 v1(3470,2485)
RX: H1.3 IC1.34 | length 534.4
  Top Layer w12: IC1.34 2916.97,3331.97 2940,3355 3125,3355 H1.3
TX: H1.2 IC1.35 | length 496.1
  Top Layer w12: IC1.35 2866.97,3336.97 2910,3380 3065,3380 3194.62,3509.62 3194.62,3510.28 3210,3525.66 H1.2
pads on no net: IC1.4 IC1.5 IC1.6 IC1.7 IC1.13 IC1.14 IC1.16 IC1.17 IC1.18 IC1.20 IC1.21 IC1.22 IC1.23 IC1.26 IC1.29 IC1.33 IC1.36 IC1.37 IC2.5 IC2.6 IC2.7 IC2.10 IC2.11 IC2.12 S2.S1 S2.S2 U1.5 U1.6 U1.12 U1.13

## Polygon pours and split planes (outlines as drawn)
3V3 on Top Layer "Top Layer-3V3" (solid, remove dead copper, pour order 0): 2890,2425 2910,2445 2910,2475 2885,2500 2760,2500 2752,2508 2752,2425
GND on Top Layer "GND_L01_P005" (solid, remove dead copper, pour order 5): 5035,3695 3960,3695 3960,2965 4160,2765 4160,1970 5045,1970 5050,1975
GND on Top Layer "GND_L01_P006" (solid, remove dead copper, pour order 6): 3465,3689.97 3472.5,2787.5 3555,2705 4020,2705 4020,1980 2680,1980 2680,3695
GND on Top Layer "GND_L01_P007" (solid, pour order 7): 3495.15,2804.85 3560,2740 3970,2740 3970,2906.39 3930,2946.39 3930,3690 3495,3690 3490,3695
GND on Top Layer "GND_L01_P008" (solid, remove dead copper, pour order 8): 4159.8,2392.8 4060,2293 4060,2000 4170,2000
GND on Top Layer "GND_L01_P009" (solid, pour order 9): 4020,2705 4125,2705 4125,2600 4020,2495 4015,2495
GND on Bottom Layer "GND_L02_P004" (solid, remove dead copper, pour order 4): 3490,2810 3560,2740 4105,2740 4105,2766.39 3925,2946.39 3925,3690 3490,3690
GND on Bottom Layer "GND_L02_P003" (solid, remove dead copper, pour order 3): 3455,3690 3460,2795 3550,2705 3980,2705 4015,2670 4015,1980 2675,1980 2675,3695
GND on Bottom Layer "GND_L02_P010" (solid, pour order 10): 4165,2385 4145,2385 4060,2300 4060,1970 4165,1970
GND on Bottom Layer "GND_L02_P002" (solid, remove dead copper, pour order 2): 5030,3695 3955,3695 3955,2965 4150,2770 4150,1970 5040,1970 5045,1975
3V3 on Bottom Layer "Bottom Layer-3V3" (solid, remove dead copper, pour order 1): 2892.5,2425 2900,2432.5 2900,2487.5 2882.5,2505 2757.5,2505 2757.5,2425

## Keep-outs
Keep-Out Layer:
  lines w10: 2672.87,2147.13 2672.87,3552.87 cw(c2815,3552.87) 2815,3695 4875,3695 4895,3695 cw(c4895,3558.2) 5031.8,3558.2 5031.8,2141.8 5031.8,2116.8 ; 2673.2,2151.8 2673.2,2116.8 ccw(c2810,2116.8) 2810,1980 ; 2812.46,1977.54 2832.46,1977.54 4867.54,1977.54 ; 4868.2,1978.2 4893.2,1978.2 ccw(c4893.2,2115) 5030,2115

## Silkscreen, mask and mechanical layers (free items; w line width, h text height)
Bottom Overlay:
  drawing of 46 lines, arcs and shapes, not listed
  text "Audio" at 3800,3615 h40
  text "DC motor" at 4280,3615 h40
  text "UART" at 3330,3605 h40
  text "ExtDC" at 4993.34,3345 h40 r90
  text "5V" at 4455,3075 h40 r90
  text "M_supply" at 4556.67,3075 h40 r90
  text "ExtDC" at 4655,3075 h40 r90
  text "Stepper" at 4986.67,2880 h40 r90
  text "5V_2" at 4140,2058.34 h40 r180
  text "5V_1" at 4490,2058.34 h40 r180
  text "Config" at 3700,2055 h40 r180

## Text inside footprints (layer, text, board x,y; h text height)
IC1: Mechanical 13 "ANTENNA" at 2569.72,2705.91 h35 r90